# EAGLE board display (EAGLE 4.16)
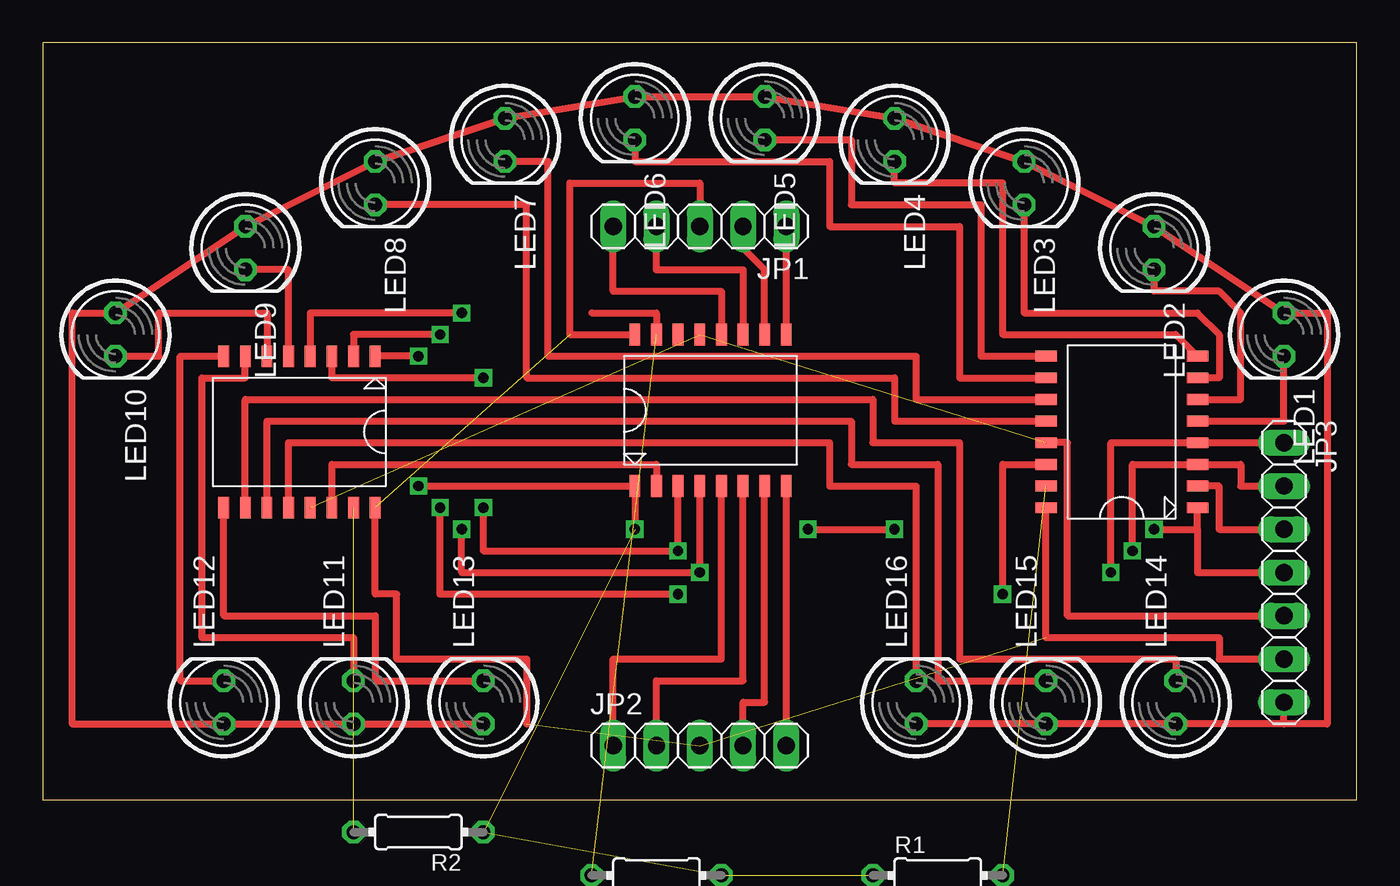
[diagram p0: board, top side]
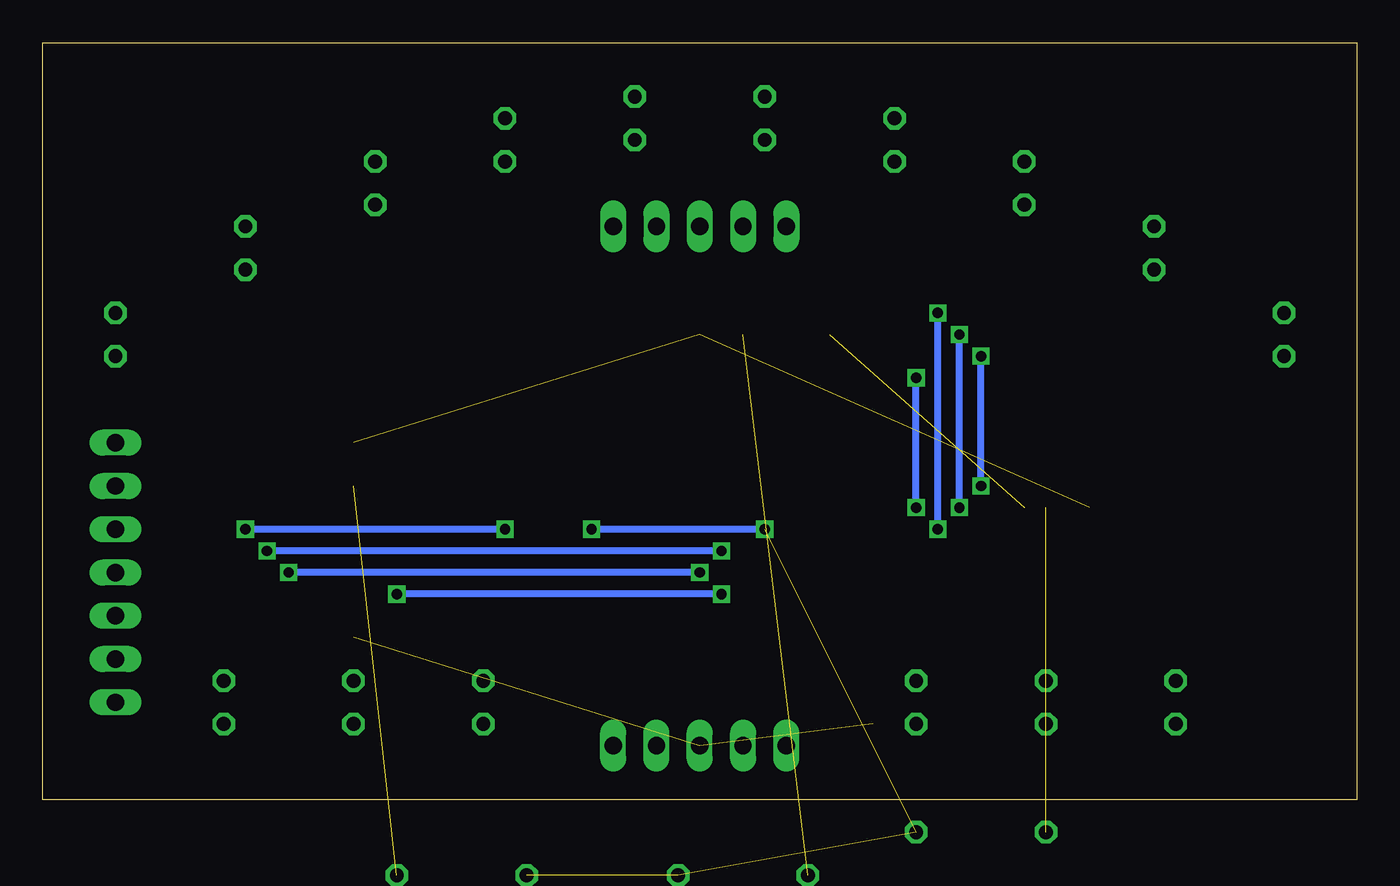
[diagram p1: board, bottom side, seen from below]

Size 77.14 x 44.44 mm. Coordinates in mm from the lower left corner, seen from the top.
Outline: 0,0 77.14,0 77.14,44.44 0,44.44 0,0
Copper layers (1*16): Top 0.035mm / dielectric 1.5mm / Bottom 0.035mm
Design rules "default": minimum track width 10mil, minimum drill 24mil, track to track 8mil, track to pad 8mil, pad to pad 8mil, via to via 8mil, smd to smd 8mil, copper to edge 40mil, drill to drill 8mil, minimum pad ring 10mil, minimum via ring 8mil, stop-mask expansion 4mil, vias tented up to drill 0mil, thermal gap 10mil

## Footprints (pad centres in the part's own frame; a part is rotated, then mirrored left to right if it is on the bottom)
1X05 = drill 1.016 long: 1 -5.08,0; 2 -2.54,0; 3 0,0; 4 2.54,0; 5 5.08,0
1X07 = drill 1.016 long: 1 -7.62,0; 2 -5.08,0; 3 -2.54,0; 4 0,0; 5 2.54,0; 6 5.08,0; 7 7.62,0
LED5MM = drill 0.813 octagon: A -1.27,0; K 1.27,0
0204/7 = drill 0.813 octagon: 1 -3.81,0; 2 3.81,0
SOIC16 = smd 1.27 x 0.635: 1 -2.54,2.54; 2 -2.54,1.27; 3 -2.54,0; 4 -2.54,-1.27; 5 -2.54,-2.54; 6 -2.54,-3.81; 7 -2.54,-5.08; 8 -2.54,-6.35; 9 6.35,-6.35; 10 6.35,-5.08; 11 6.35,-3.81; 12 6.35,-2.54; 13 6.35,-1.27; 14 6.35,0; 15 6.35,1.27; 16 6.35,2.54

## Placement (x,y rotation side)
JP1  [1X05]  38.57,33.65 180 top
JP2  [1X05]  38.57,3.17 0 top
JP3  [1X07]  72.86,13.33 270 top
LED1  [LED5MM]  72.86,27.3 270 top
LED2  [LED5MM]  65.24,32.38 270 top
LED3  [LED5MM]  57.62,36.19 270 top
LED4  [LED5MM]  50,38.73 270 top
LED5  [LED5MM]  42.38,40 270 top
LED6  [LED5MM]  34.76,40 270 top
LED7  [LED5MM]  27.14,38.73 270 top
LED8  [LED5MM]  19.52,36.19 270 top
LED9  [LED5MM]  11.9,32.38 270 top
LED10  [LED5MM]  4.28,27.3 270 top
LED11  [LED5MM]  18.25,5.71 90 top
LED12  [LED5MM]  10.63,5.71 90 top
LED13  [LED5MM]  25.87,5.71 90 top
LED14  [LED5MM]  66.51,5.71 90 top
LED15  [LED5MM]  58.89,5.71 90 top
LED16  [LED5MM]  51.27,5.71 90 top
R1  [0204/7]  52.54,-4.45 0 top  (outside the outline)
R2  [0204/7]  22.06,-1.91 180 top
R3  [0204/7]  36.03,-4.45 180 top  (outside the outline)
U$1  A6275  [SOIC16]  65.24,19.68 180 top
U$2  A6275  [SOIC16]  37.3,20.95 90 top
U$3  A6275  [SOIC16]  16.98,23.49 270 top

## Library data of the parts
JP1-JP3 = pinhead
LED1-LED16 = led
R1-R3 = rcl
U$1-U$3 = rnie04

## Nets
0V: JP3.4 R1.1 R2.1 R3.1 U$1.1 U$2.1 U$3.1
+3V3: JP3.7 LED1.A LED2.A LED3.A LED4.A LED5.A LED6.A LED7.A LED8.A LED9.A LED10.A LED11.A LED12.A LED13.A LED14.A LED15.A LED16.A
+5V: JP1.3 JP2.3 JP3.6 U$1.16 U$2.16 U$3.16
N$1: LED1.K U$1.5
N$2: LED2.K U$1.6
N$3: LED3.K U$1.7
N$4: LED4.K U$1.8
N$5: LED5.K U$1.9
N$6: LED6.K U$1.10
N$7: LED7.K U$1.11
N$8: LED8.K U$1.12
N$9: LED9.K U$3.5
N$10: LED10.K U$3.6
N$11: JP3.3 U$1.2
N$12: JP3.2 U$1.3 U$2.3 U$3.3
N$13: JP3.1 U$1.4 U$2.4 U$3.4
N$14: U$1.14 U$3.2
N$15: U$2.2 U$3.14
N$16: JP1.5 U$2.12
N$17: JP1.4 U$2.11
N$18: JP1.2 U$2.10
N$19: JP1.1 U$2.9
N$20: JP2.5 U$2.8
N$21: JP2.4 U$2.7
N$22: JP2.2 U$2.6
N$23: JP2.1 U$2.5
N$24: LED11.K U$3.7
N$25: LED12.K U$3.8
N$26: LED13.K U$3.9
N$27: LED14.K U$3.10
N$28: LED15.K U$3.11
N$29: LED16.K U$3.12
N$30: R1.2 U$1.15
N$31: R2.2 U$3.15
N$32: R3.2 U$2.15
N$33: JP3.5 U$1.13 U$2.13 U$3.13

## Tracks (layer width: path | path; a pad name or v marks a point on that pad's centre or on a via)
0V  (via drill 0.6)  (3 unrouted)
  Top 0.406: v22.06,26.03 U$3.1 | v22.06,18.41 U$2.1 v34.76,15.87 | 67.78,15.87 U$1.1 | v65.24,15.87 67.78,15.87 | v44.92,15.87 v50,15.87 | 67.78,15.87 67.78,13.33 JP3.4
  Bottom 0.406: v22.06,18.41 v22.06,26.03 | v50,15.87 v65.24,15.87 | v34.76,15.87 v44.92,15.87
+3V3
  Top 0.406: LED6.A LED7.A LED8.A LED9.A LED10.A 1.74,28.57 1.74,4.44 LED12.A LED11.A LED13.A | LED6.A LED5.A | LED5.A LED4.A LED3.A LED2.A LED1.A 75.4,28.57 75.4,4.44 72.86,4.44 | LED6.A LED5.A | LED16.A LED15.A LED14.A 72.86,4.44 | 72.86,4.44 JP3.7
+5V  (3 unrouted)
  Top 0.406: U$2.16 30.95,27.3 30.95,36.19 38.57,36.19 JP1.3 | U$1.16 58.89,9.52 69.05,9.52 69.05,8.25 JP3.6 | U$3.16 19.52,12.06 20.79,12.06 20.79,8.25 28.41,8.25 28.41,4.44
N$1
  Top 0.406: LED1.K 72.86,22.22 U$1.5
N$2
  Top 0.406: LED2.K 65.24,29.84 69.05,29.84 70.32,28.57 70.32,23.49 U$1.6
N$3
  Top 0.406: LED3.K 57.62,28.57 67.78,28.57 69.05,27.3 69.05,24.76 U$1.7
N$4
  Top 0.406: LED4.K 50,36.19 56.35,36.19 56.35,27.3 66.51,27.3 U$1.8
N$5
  Top 0.406: LED5.K 47.46,38.73 47.46,34.92 55.08,34.92 55.08,26.03 U$1.9
N$6
  Top 0.406: LED6.K 34.76,37.46 46.19,37.46 46.19,33.65 53.81,33.65 53.81,24.76 U$1.10
N$7
  Top 0.406: LED7.K 29.68,37.46 29.68,26.03 51.27,26.03 51.27,23.49 U$1.11
N$8
  Top 0.406: LED8.K 28.41,34.92 28.41,24.76 50,24.76 50,22.22 U$1.12
N$9
  Top 0.406: LED9.K 14.44,31.11 U$3.5
N$10
  Top 0.406: LED10.K 6.82,26.03 6.82,28.57 13.17,28.57 U$3.6
N$11
  Top 0.406: U$1.2 69.05,18.41 69.05,15.87 JP3.3
N$12  (via drill 0.6)
  Top 0.406: U$2.3 v37.3,14.6 25.87,14.6 v25.87,17.14 | U$3.3 16.98,24.76 v25.87,24.76 | v63.97,14.6 63.97,19.68 U$1.3 70.32,19.68 70.32,18.41 JP3.2
  Bottom 0.406: v25.87,17.14 v25.87,24.76 | v37.3,14.6 v63.97,14.6
N$13  (via drill 0.6)
  Top 0.406: U$2.4 v38.57,13.33 24.6,13.33 v24.6,15.87 | U$3.4 15.71,28.57 v24.6,28.57 | v62.7,13.33 62.7,20.95 U$1.4 JP3.1
  Bottom 0.406: v24.6,15.87 v24.6,28.57 | v38.57,13.33 v62.7,13.33
N$14  (via drill 0.6)
  Top 0.406: U$3.2 18.25,27.3 v23.33,27.3 | U$1.14 56.35,19.68 v56.35,12.06 | v37.3,12.06 23.33,12.06 v23.33,17.14
  Bottom 0.406: v37.3,12.06 v56.35,12.06 | v23.33,17.14 v23.33,27.3
N$15
  Top 0.406: U$2.2 36.03,19.68 16.98,19.68 U$3.14
N$16
  Top 0.406: JP1.5 33.49,29.84 39.84,29.84 U$2.12
N$17
  Top 0.406: JP1.4 36.03,31.11 41.11,31.11 U$2.11
N$18
  Top 0.406: JP1.2 41.11,32.38 42.38,31.11 U$2.10
N$19
  Top 0.406: U$2.9 JP1.1
N$20
  Top 0.406: JP2.5 U$2.8
N$21
  Top 0.406: JP2.4 41.11,5.71 42.38,5.71 U$2.7
N$22
  Top 0.406: JP2.2 36.03,6.98 41.11,6.98 U$2.6
N$23
  Top 0.406: JP2.1 33.49,8.25 39.84,8.25 U$2.5
N$24
  Top 0.406: U$3.7 11.9,24.76 9.36,24.76 9.36,9.52 18.25,9.52 LED11.K
N$25
  Top 0.406: U$3.8 8.09,26.03 8.09,6.98 LED12.K
N$26
  Top 0.406: U$3.9 10.63,10.79 19.52,10.79 19.52,6.98 LED13.K
N$27
  Top 0.406: U$3.10 11.9,23.49 48.73,23.49 48.73,20.95 53.81,20.95 53.81,8.25 66.51,8.25 LED14.K
N$28
  Top 0.406: U$3.11 13.17,22.22 47.46,22.22 47.46,19.68 52.54,19.68 52.54,6.98 LED15.K
N$29
  Top 0.406: U$3.12 14.44,20.95 46.19,20.95 46.19,18.41 51.27,18.41 LED16.K
N$30  (1 unrouted)
N$31  (1 unrouted)
N$32  (1 unrouted)
  Top 0.406: U$2.15 36.03,28.57 32.22,28.57
N$33  (2 unrouted)
  Top 0.406: U$1.13 60.16,20.95 60.16,10.79 JP3.5